# EAGLE board rev7 (EAGLE 9.4.2)
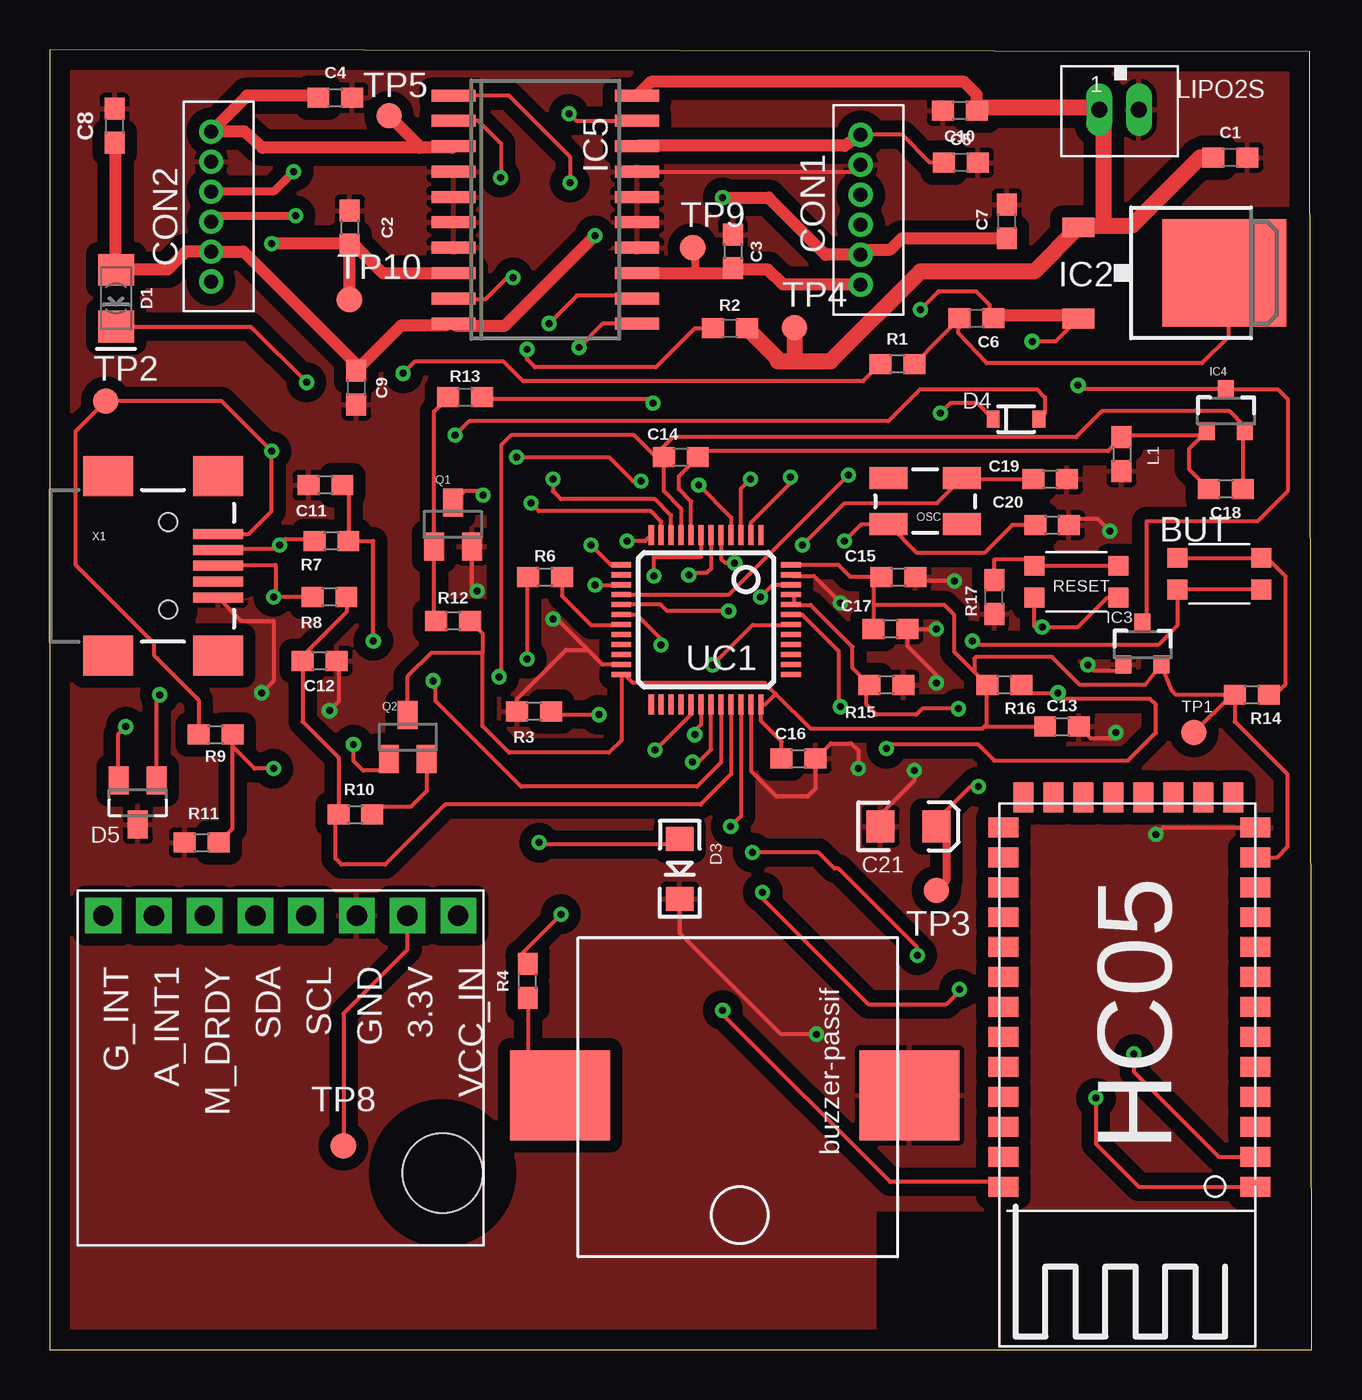
[diagram p0: board, top side]
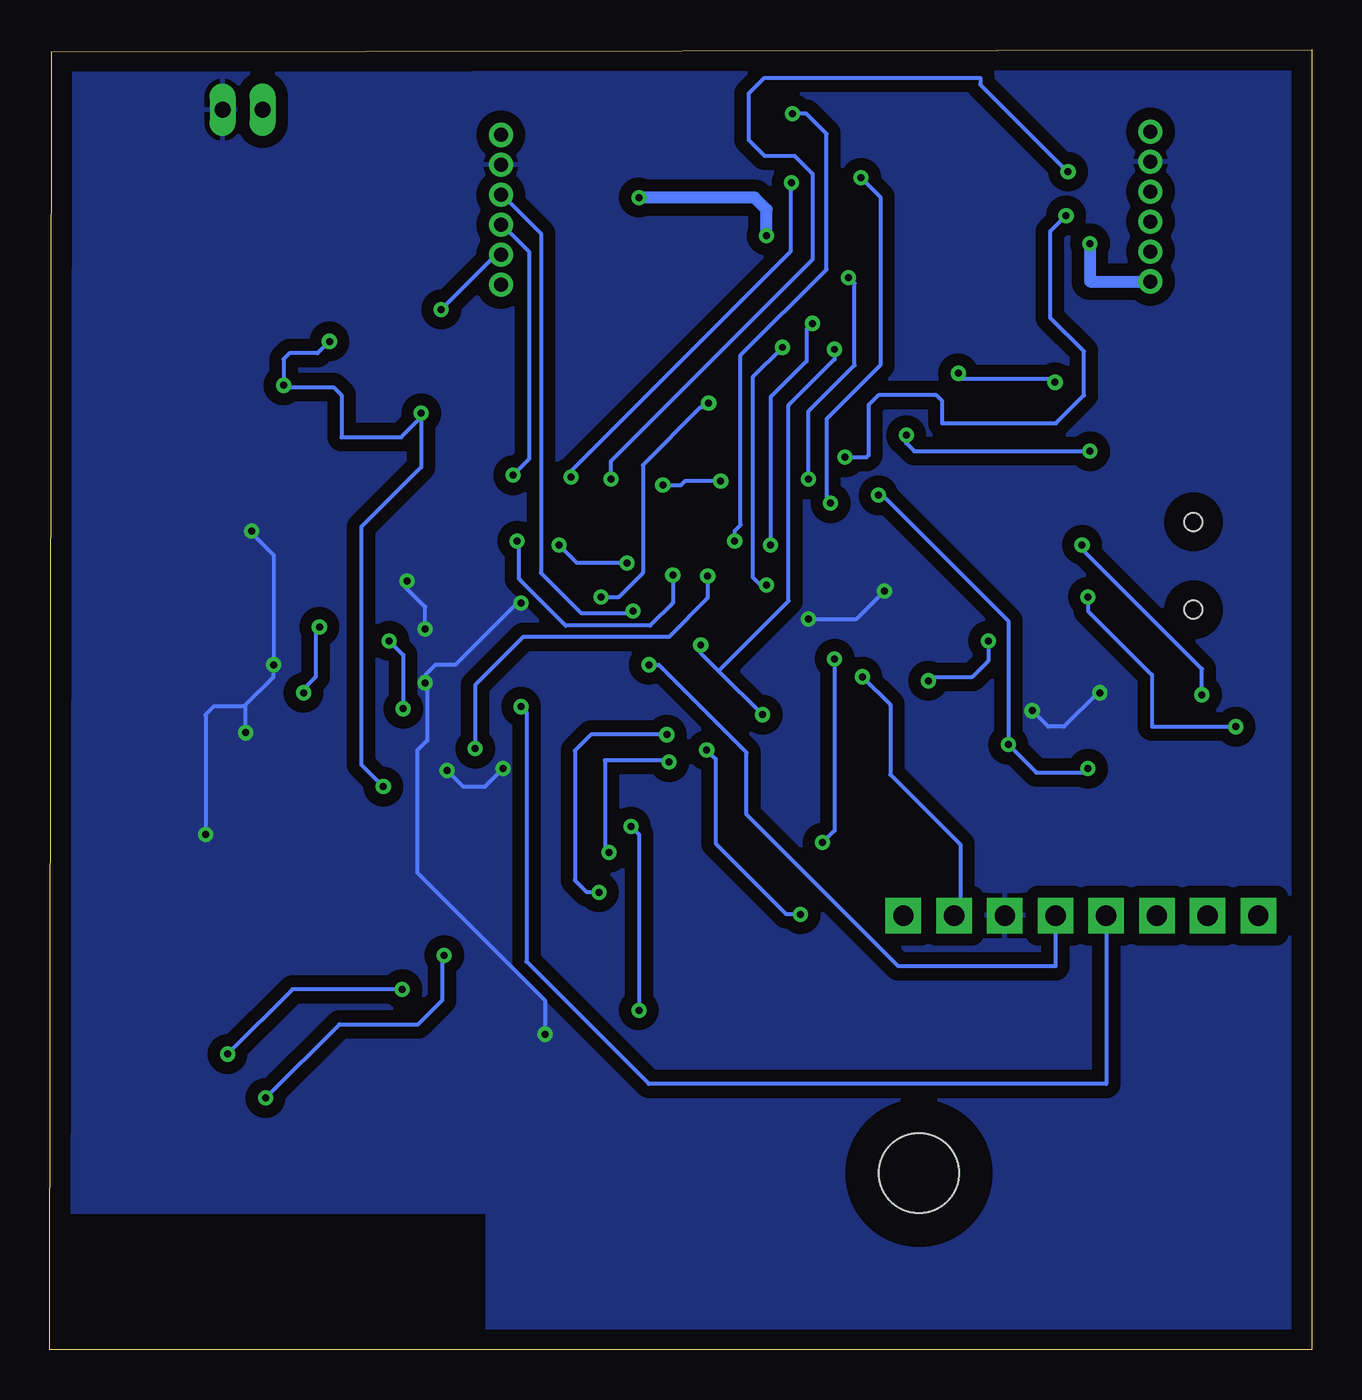
[diagram p1: board, bottom side, seen from below]

Size 63.2 x 65.1 mm. Coordinates in mm from the lower left corner, seen from the top.
Outline: 0,0 63.2,0 63.1,65 0,65.1 0,0
Copper layers (1*16): Top 0.035mm / dielectric 1.5mm / Bottom 0.035mm
Design rules "default": minimum track width 6mil, minimum drill 0.35mm, track to track 6mil, track to pad 6mil, pad to pad 6mil, via to via 6mil, smd to smd 6mil, copper to edge 40mil, drill to drill 6mil, minimum pad ring 10mil, minimum via ring 8mil, stop-mask expansion 4mil, vias tented up to drill 0mil, thermal gap 10mil
Net classes: 0 default: width 0.203 mm; 2 bigalime: width 0.381 mm

## Footprints (pad centres in the part's own frame; a part is rotated, then mirrored left to right if it is on the bottom)
PUSHBUTTON-KMR241GLFS = smd 1 x 1: P$1 2.1,0.8; P$2 2.1,-0.8; P$3 -2.1,0.8; P$4 -2.1,-0.8
0603 = smd 1.1 x 1: 1 -0.85,0; 2 0.85,0
EIA3216 = smd 1.4 x 1.6: A 1.4,0; C -1.4,0
B6B-ZR = drill 0.7: 1 9,-1.3; 2 7.5,-1.3; 3 6,-1.3; 4 4.5,-1.3; 5 3,-1.3; 6 1.5,-1.3
FKIT-LED-1206 = smd 1.6 x 1.803: A -1.422,0; C 1.422,0
LED-1206 = smd 1.2 x 1.4: A -1.5,0; C 1.5,0
SOD-323 = smd 0.63 x 0.83: 1 -1.15,0; 2 1.15,0
SOT23 = smd 1 x 1.4: 1 -0.95,-1.1; 2 0.95,-1.1; 3 0,1.1
DPACK_3 = smd 1 x 1.6: 1 -2.28,-4.8; 3 2.28,-4.8 | smd 5.4 x 6.2: 4 0,2.5
SOT23' = smd 0.8 x 0.9: 1 -0.95,-1; 2 0.95,-1; 3 0,1.1
SO20 = smd 0.6 x 2.2: 1 -5.715,-4.6; 2 -4.445,-4.6; 3 -3.175,-4.6; 4 -1.905,-4.6; 5 -0.635,-4.6; 6 0.635,-4.6; 7 1.905,-4.6; 8 3.175,-4.6; 9 4.445,-4.6; 10 5.715,-4.6; 11 5.715,4.6; 12 4.445,4.6; 13 3.175,4.6; 14 1.905,4.6; 15 0.635,4.6; 16 -0.635,4.6; 17 -1.905,4.6; 18 -3.175,4.6; 19 -4.445,4.6; 20 -5.715,4.6
JST_B2B-PH_HEADER = drill 0.8 long: P1 1.075,0.048; P2 -0.925,0.048
CRYSTAL-SMD-5X3 = smd 1.9 x 1.1: 1 -1.85,-1.15; 2 1.85,-1.15; 3 1.85,1.15; 4 -1.85,1.15
B1,27 = smd 1.27 x 1.27: TP 0,0
BUZZER-PASSIF = smd 4.5 x 5: P$1 0,2.5; P$2 0,20
HC-05 = smd 1.5 x 1: 3.3 0,-16.5; GND 0,-18; KEY 12.6,0; P$3 0,-3; P$4 0,-4.5; P$5 0,-6; P$6 0,-7.5; P$7 0,-9; P$8 0,-10.5; P$9 0,-12; P$10 0,-13.5; P$11 0,-15; P$23 12.6,-1.5; P$24 12.6,-3; P$25 12.6,-4.5; P$26 12.6,-6; P$27 12.6,-7.5; P$28 12.6,-9; P$29 12.6,-10.5; P$30 12.6,-12; P$31 12.6,-13.5; P$32 12.6,-15; P$33 12.6,-16.5; P$34 12.6,-18; RX 0,-1.5; TX 0,0 | smd 1 x 1.5: P$14 1.1,-19.5; P$15 2.6,-19.5; P$16 4.1,-19.5; P$17 5.6,-19.5; P$18 7.1,-19.5; P$19 8.6,-19.5; P$20 10.1,-19.5; P$21 11.6,-19.5
GY-85 = drill 1.016 pad 1.778 square: 3.3 0,15.24; A_INT1 0,2.54; G_INT 0,0; GND 0,12.7; M_DRDY 0,5.08; SCL 0,10.16; SDA 0,7.62; VCC_IN 0,17.78 | hole 4: 12.9,17
LQFP48 = smd 0.254 x 1: 1 -2.75,-4.25; 2 -2.25,-4.25; 3 -1.75,-4.25; 4 -1.25,-4.25; 5 -0.75,-4.25; 6 -0.25,-4.25; 7 0.25,-4.25; 8 0.75,-4.25; 9 1.25,-4.25; 10 1.75,-4.25; 11 2.25,-4.25; 12 2.75,-4.25; 25 2.75,4.25; 26 2.25,4.25; 27 1.75,4.25; 28 1.25,4.25; 29 0.75,4.25; 30 0.25,4.25; 31 -0.25,4.25; 32 -0.75,4.25; 33 -1.25,4.25; 34 -1.75,4.25; 35 -2.25,4.25; 36 -2.75,4.25 | smd 1 x 0.254: 13 4.25,-2.75; 14 4.25,-2.25; 15 4.25,-1.75; 16 4.25,-1.25; 17 4.25,-0.75; 18 4.25,-0.25; 19 4.25,0.25; 20 4.25,0.75; 21 4.25,1.25; 22 4.25,1.75; 23 4.25,2.25; 24 4.25,2.75; 37 -4.25,2.75; 38 -4.25,2.25; 39 -4.25,1.75; 40 -4.25,1.25; 41 -4.25,0.75; 42 -4.25,0.25; 43 -4.25,-0.25; 44 -4.25,-0.75; 45 -4.25,-1.25; 46 -4.25,-1.75; 47 -4.25,-2.25; 48 -4.25,-2.75
USB-MINIB = smd 2.5 x 0.5: D+ 2.5,0; D- 2.5,0.8; GND 2.5,-1.6; ID 2.5,-0.8; VBUS 2.5,1.6 | smd 2.5 x 2: GND@1 -3,-4.5; GND@2 -3,4.5; GND@3 2.5,4.5; GND@4 2.5,-4.5 | hole 0.9: 0,2.2; 0,-2.2

## Placement (x,y rotation side)
BUT  KMR211GLFS  [PUSHBUTTON-KMR241GLFS]  58.57,38.86 0 top
C1  0.1uF  [0603]  59.13,59.71 0 top
C2  22nF  [0603]  15.02,56.21 270 top
C3  22nF  [0603]  34.21,55.01 270 top
C4  22nF  [0603]  14.3,62.71 0 top
C5  22nF  [0603]  45.63,59.46 0 top
C6  0.1uF  [0603]  46.42,51.66 180 top
C7  22nF  [0603]  47.94,56.51 90 top
C8  22nF  [0603]  3.24,61.3 90 top
C9  22nF  [0603]  15.34,48.19 270 top
C10  22nF  [0603]  45.58,62.06 180 top
C11  47pF  [0603]  13.8,43.3 180 top
C12  47pF  [0603]  13.5,34.5 0 top
C13  10uF  [0603]  50.7,31.2 0 top
C14  1uF  [0603]  31.6,44.7 0 top
C15  1uF  [0603]  42.5,38.7 0 top
C16  1uF  [0603]  37.5,29.6 0 top
C17  1uF  [0603]  42.1,36.1 0 top
C18  10uF  [0603]  58.9,43.1 180 top
C19  18pF  [0603]  50.1,43.6 0 top
C20  18pF  [0603]  50.2,41.3 0 top
C21  100uF  [EIA3216]  43.01,26.21 0 top
CON1  B6B-ZR  [B6B-ZR]  39.31,51.84 90 top
CON2  B6B-ZR  [B6B-ZR]  6.77,52 90 top
D1  [FKIT-LED-1206]  3.31,52.66 270 top
D3  Blue  [LED-1206]  31.55,24.08 270 top
D4  [SOD-323]  48.39,46.61 0 top
D5  PESD1CAN  [SOT23]  4.4,27.4 180 top
IC2  MC78M05ABDT  [DPACK_3]  56.32,53.93 270 top
IC3  MCP1703T-3302E/CB  [SOT23']  54.73,35.31 0 top
IC4  MCP1703T-3302E/CB  [SOT23']  58.91,47.01 0 top
IC5  L293DD  [SO20]  24.82,57.1 270 top
L1  ferrite bead  [0603]  53.68,44.86 270 top
LIPO2S  JST-PH_2-PIN_HEADER  [JST_B2B-PH_HEADER]  53.63,62.15 180 top
OSC  8MHz  [CRYSTAL-SMD-5X3]  43.84,42.5 0 top
Q1  NPN-BJT  [SOT23]  20.19,41.33 0 top
Q2  NPN-BJT  [SOT23]  17.93,30.68 0 top
R1  133  [0603]  42.44,49.37 0 top
R2  60k  [0603]  34.06,51.16 0 top
R3  30k  [0603]  24.25,31.96 180 top
R4  100  [0603]  23.94,18.46 90 top
R6  1k  [0603]  24.8,38.7 0 top
R7  22  [0603]  14.1,40.5 180 top
R8  22  [0603]  14,37.7 180 top
R9  10k  [0603]  8.3,30.8 180 top
R10  1.5k  [0603]  15.3,26.8 0 top
R11  36k  [0603]  7.6,25.4 0 top
R12  47k  [0603]  20.2,36.5 0 top
R13  1k  [0603]  20.8,47.7 0 top
R14  1k  [0603]  60.2,32.8 180 top
R15  10k  [0603]  41.9,33.3 180 top
R16  10k  [0603]  47.8,33.3 180 top
R17  1k  [0603]  47.3,37.7 90 top
RESET  KMR211GLFS  [PUSHBUTTON-KMR241GLFS]  51.42,38.46 0 top
TP1  PTR1B1,27  [B1,27]  57.3,30.9 0 top
TP2  PTR1B1,27  [B1,27]  2.8,47.5 0 top
TP3  PTR1B1,27  [B1,27]  44.4,23 0 top
TP4  PTR1B1,27  [B1,27]  37.3,51.2 0 top
TP5  PTR1B1,27  [B1,27]  17,61.8 0 top
TP8  PTR1B1,27  [B1,27]  14.7,10.2 0 top
TP9  PTR1B1,27  [B1,27]  32.2,55.2 0 top
TP10  PTR1B1,27  [B1,27]  15,52.6 0 top
U$1  BUZZER-PASSIF  [BUZZER-PASSIF]  45.56,12.74 90 top
U$4  HC05  [HC-05]  60.37,8.16 180 top
U$6  GY-85  [GY-85]  2.67,21.74 270 top
UC1  STM32F103CBT6  [LQFP48]  32.87,36.56 180 top
X1  USB-MINIB  [USB-MINIB]  5.92,39.26 0 top

## Library data of the parts
BUT IC3 IC4 RESET = okie
C1 C6 C11-C20 = SparkFun-Capacitors; PROD_ID: CAP-00810
C2-C5 C7-C10 = SparkFun-Capacitors; PROD_ID: CAP-07885
C21 D4 L1 = SparkFun3
CON1 CON2 = jst
D1 = SparkFun-LED
D3 = SparkFun
D5 = diode
IC2 = linear
IC5 = st-microelectronics; OC_FARNELL: unknown
LIPO2S = srg
OSC Q1 Q2 X1 = SparkFun2
R1-R4 R6-R17 = SparkFun-Resistors; PROD_ID: RES-08787
TP1-TP5 TP8-TP10 = testpad
U$1 = buzzer_smd
U$4 = rhoban; FARNELL: MODULE HC-05
U$6 = rhoban
UC1 = stm32

## Nets
1A: IC5.2 UC1.11
2A: IC5.9 UC1.10
3/AIN: R2.1 R3.1 UC1.18
3A: IC5.12 UC1.13
4A: IC5.19 UC1.12
5V: C6.1 C7.1 C8.1 C9.1 C21.A CON1.5 CON2.5 D1.A D4.1 IC2.3 IC3.3 IC4.3 IC5.10 TP3.TP
9V: C1.1 C10.1 IC2.1 IC5.20 LIPO2S.P1 R2.2 TP4.TP
23_USBDP: C12.1 R8.1 R10.1 UC1.33
24_USBDM: C11.1 R7.1 UC1.32
27/PWM: R4.2 UC1.29
32: BUT.P$2 BUT.P$4 R15.2 UC1.44 UC1.45
33: R6.2 UC1.19
+5V/2: D4.2 R9.2 TP2.TP X1.VBUS
AV+: C14.1 C18.1 IC4.2 TP8.TP U$6.3.3 UC1.9
AV-: C14.2 C18.2 IC4.1 L1.1 UC1.8
DGND: C1.2 C2.1 C3.1 C4.2 C5.2 C7.2 C8.2 C9.2 C10.2 C11.2 C12.2 C13.2 C15.2 C16.2 C17.2 C19.2 C20.2 C21.C CON1.2 CON2.2 D3.C D5.3 IC3.1 IC5.4 IC5.5 IC5.6 IC5.7 IC5.14 IC5.15 IC5.16 IC5.17 L1.2 LIPO2S.P2 Q1.2 R3.2 R11.1 R15.1 R17.1 U$1.P$1 U$4.GND U$6.GND UC1.23 UC1.35 UC1.47 X1.GND
DISC: R13.2 UC1.46
EN: U$4.KEY UC1.34
GNDA: C6.2 IC2.4 R1.2
MM4: CON2.3 UC1.3
MM5: CON2.4 UC1.4
MM6: CON1.4 UC1.16
MM7: CON1.3 UC1.17
MM28: IC5.1 UC1.2
MM29: IC5.11 UC1.15
N$1: D1.C R1.1
N$2: R4.1 U$1.P$2
N$6: UC1.40
N$20: BUT.P$1 BUT.P$3 R14.1
N$21: R17.2 RESET.P$1 RESET.P$3
N$22: D3.A R6.1
N$51: Q2.2 R10.2
N$59: D5.1 R7.2 X1.D-
N$60: D5.2 R8.2 X1.D+
N$71: Q1.3 Q2.1 R9.1 R11.2
N$73: Q1.1 R12.1 R13.1
NONE: U$6.VCC_IN
OSC_IN: C19.1 OSC.3 UC1.5
OSC_OUT: C20.1 OSC.1 UC1.6
OUT1: C4.1 CON2.1 IC5.3 TP5.TP
OUT2: C2.2 CON2.6 IC5.8 TP10.TP
OUT3: C3.2 CON1.6 IC5.13 TP9.TP
OUT4: C5.1 CON1.1 IC5.18
RESET: R16.1 RESET.P$2 RESET.P$4 UC1.7
RX: U$4.RX UC1.30
SCL: U$6.SCL UC1.42
SDA: U$6.SDA UC1.43
TX: U$4.TX UC1.31
VBAT: UC1.1
VCC: C13.1 C15.1 C16.1 C17.1 IC3.2 Q2.3 R12.2 R14.2 R16.2 TP1.TP U$4.3.3 UC1.24 UC1.36 UC1.48

## Tracks (layer width: path | path; a pad name or v marks a point on that pad's centre or on a via)
1A  (via drill 0.35)
  Top 0.203: UC1.11 30.62,41.48 30.1,42 24.5,42 v24.1,42.4 | v22.57,58.7 22.6,58.73 22.6,60.4 21.46,61.54 IC5.2
  Bottom 0.203: v24.1,42.4 24.3,42.6 24.3,46.6 21.6,49.3 21.6,57.73 v22.57,58.7
2A  (via drill 0.35)
  Top 0.203: UC1.10 31.12,41.78 30.3,42.6 25.6,42.6 25.2,43 v25.2,43.6 | v23.2,53.7 22.9,53.7 21.8,52.6 20.27,52.6 IC5.9
  Bottom 0.203: v25.2,43.6 25.2,47 22.9,49.3 22.9,53.4 v23.2,53.7
3/AIN  (via drill 0.35)
  Top 0.203: v30.6,35.3 30.6,35.6 29.4,36.8 28.8,36.8 UC1.18 | v23.9,50.1 23.9,49.6 24.3,49.2 30.35,49.2 32.31,51.16 R2.1 | R3.1 25.25,31.8 v27.5,31.8
  Bottom 0.203: 29.7,34 v27.5,31.8 | 29.7,34 30.6,34.9 v30.6,35.3 | 29.7,34 26.2,37.5 26.2,47.3 23.9,49.6 v23.9,50.1
3A  (via drill 0.35)
  Top 0.203: UC1.13 28.1,39.3 v27.1,40.3 | v25,51.4 26.4,52.8 29.3,52.8 IC5.12
  Bottom 0.203: v25,51.4 25.3,51.1 25.3,49.5 27.1,47.7 v27.1,40.3
4A  (via drill 0.35)
  Top 0.203: v28.9,40.5 v28.91,40.51 29.82,40.51 UC1.12 | v26,61.9 26.36,61.54 IC5.19
  Bottom 0.203: v28.9,40.5 28.9,41 28.6,41.3 28.6,49.8 24.3,54.1 24.3,60.9 25.3,61.9 v26,61.9
5V  (via drill 0.35)
  Top 0.203: 47.4,51.8 C6.1 47.07,51.86 47.07,52.33 46.4,53 44.5,53 v43.6,52.1 | 51.3,51.8 IC2.3 50.38,50.5 v49.2,50.5 | 19.8,51.3 IC5.10 20.3,51.3 | 3.3,60.41 C8.1 | 3.3,54.3 D1.A | 15.28,49.42 C9.1 | D4.1 46.45,47.4 45.1,47.4 v44.6,46.9 | v51.5,48.3 51.7,48.1 IC4.3 61.49,48.11 62,47.6 62,43 60.5,41.5 54.93,41.5 54.93,36.61 IC3.3 | v46.5,28.2 46.1,28.2 44.41,26.51 C21.A
  Top 0.406: C21.A 44.9,25.71 44.9,23.5 TP3.TP
  Top 0.61: 51.3,51.8 47.4,51.8 | C7.1 42.66,55.66 42.1,55.1 40.61,55.1 CON1.5 38.86,54.84 36,57.7 v33.7,57.7 | C9.1 17.6,51.3 19.8,51.3 | 3.3,54.3 3.3,60.41 | D1.A 3.33,54.1 5.9,54.1 6.8,55 CON2.5 9.7,55 15.28,49.42 | v27.3,55.8 22.8,51.3 20.3,51.3
  Bottom 0.203: v43.6,52.1 40.9,54.8 40.7,54.8 | v46.5,28.2 47.6,29.3 47.6,41.2 44.6,44.2 v44.6,46.9 44.6,46.7 45.6,45.7 48.6,45.7 48.6,47.8 49,48.2 51.4,48.2 v51.5,48.3 51.5,49.6 51.2,49.9 49.8,49.9 v49.2,50.5
  Bottom 0.61: 40.7,54.8 CON1.5 | v27.3,55.8 27.3,57.1 27.9,57.7 v33.7,57.7
9V
  Top 0.203: 51.8,56.3 IC2.1 | 52.8,61.96 LIPO2S.P1 | 36.47,49.6 36.47,49.5
  Top 0.61: C10.1 46.43,62.86 45.78,63.5 30.1,63.5 IC5.20
  Top 0.813: C10.1 46.57,62.2 52.46,62.2 LIPO2S.P1 | IC2.1 49.3,54 43.6,54 39.1,49.5 37.3,49.5 | C1.1 57.61,59.71 54.2,56.3 52.8,56.3 | 51.8,56.3 52.8,56.3 | 52.8,56.3 52.8,61.96 | 36.47,49.5 37.3,49.5 | TP4.TP 37.3,49.5 | R2.2 36.47,49.6
23_USBDP
  Top 0.203: UC1.33 34.12,28.82 32.6,27.3 19.8,27.3 16.8,24.3 14.6,24.3 14.3,24.6 14.3,26.8 R10.1 14.45,29.65 12.65,31.45 C12.1 12.65,34.75 14.85,36.95 R8.1
24_USBDM  (via drill 0.35)
  Top 0.203: UC1.32 33.62,29.42 32.4,28.2 23.6,28.2 19.3,32.5 19.3,33.4 v19.2,33.5 | C11.1 14.95,43 R7.1 16.2,40.5 v16.2,35.5
  Bottom 0.203: v19.2,33.5 19,33.7 17,33.7 16.2,34.5 v16.2,35.5
27/PWM  (via drill 0.35)
  Top 0.203: UC1.29 32.12,31.81 30.34,30.03 v30.3,30.03 | v25.6,21.8 23.52,19.72 R4.2
  Bottom 0.203: v30.3,30.03 29.86,29.59 29.86,25.36 26.3,21.8 v25.6,21.8
32  (via drill 0.35)
  Top 0.203: 37.3,37.3 38.1,37.3 40.2,35.2 40.2,34.15 R15.2 40.9,33.15 40.9,32.3 41.4,31.8 43.4,31.8 43.7,32.1 v45.5,32.1 | 37.3,37.3 37.3,37.8 UC1.45 | 37.3,37.3 UC1.44 | v46.2,35.5 46.2,35.3 55.51,35.3 56.47,36.26 BUT.P$4 BUT.P$2
  Bottom 0.203: v46.2,35.5 45.5,34.8 v45.5,32.1
33
  Top 0.203: UC1.19 28.3,36.3 27.1,36.3 25.65,37.75 R6.2
+5V/2  (via drill 0.35)
  Top 0.203: D4.2 49.84,46.91 49.84,47.69 49.43,48.1 43.6,48.1 42,46.5 21,46.5 v20.3,45.8 | R9.2 7.45,32.55 5.2,34.8 5.2,35.4 1.3,39.3 1.3,46 TP2.TP 8.6,47.5 v11.1,45 11.1,42 9.96,40.86 X1.VBUS
  Bottom 0.203: v20.3,45.8 20.3,45.4 19.9,45 v11.1,45
AV+  (via drill 0.35)
  Top 0.203: UC1.9 31.62,42.12 30.75,42.99 C14.1 30.48,44.98 | v22.5,33.7 22.6,33.8 22.6,45.3 23.1,45.8 29.25,45.8 30.27,44.77 30.48,44.98 | TP8.TP 14.7,16.83 17.91,20.04 U$6.3.3 | C18.1 59.75,45.9 IC4.2 59.86,46.24 59.1,47 52.7,47 51.4,45.7 31.2,45.7 30.48,44.98
  Bottom 0.203: U$6.3.3 17.6,22.05 17.6,25.3 21.1,28.8 21.1,32.3 v22.5,33.7
AV-
  Top 0.203: C18.2 57.06,44.09 57.06,45.11 IC4.1 57.8,45.8 53.8,45.8 L1.1 53.3,45.3 53,45 32.75,45 C14.2 31.5,43.75 31.5,43.1 32.12,42.48 UC1.8
DGND  (via drill 0.35)
  Top 0.203: UC1.23 27.69,34.31 26.95,35.05 | 26.95,35.05 25.4,36.6 v25.2,36.6 | v21.4,38 21.14,38.26 Q1.2 | v52,34.3 52.3,34 53.47,34 IC3.1 | v40.5,29.1 40.5,30 40.13,30.37 39.12,30.37 C16.2 38.35,28.1 37.95,27.7 36.4,27.7 35.12,28.98 UC1.35 | v43.3,29 43.3,28.5 41.61,26.81 C21.C | C13.2 52.15,30.6 53.15,30.6 53.4,30.86 v53.4,30.9 | v53.1,41 52.5,41.6 51.35,41.6 C20.2 | X1.GND 9.58,36.5 11.2,36.5 11.2,33.5 v10.6,32.9 | v14,32 14.45,32.45 14.45,34.4 C12.2 | v38.4,15.8 36.62,15.8 31.55,20.88 D3.C | v44.4,33.4 44.4,33.8 42.95,35.25 C17.2 44,36.1 44.1,36 44.3,36 v44.4,36.1 | UC1.47 37.17,38.76 38.26,38.76 v39.61,37.41 v39.6,37.4 | v45.3,38.5 43.55,38.5 C15.2 | R3.2 23.4,32.6 25.85,35.05 26.95,35.05 | IC5.17 40.27,59 CON1.2 | v55.4,25.8 55.76,26.16 U$4.GND
  Bottom 0.203: v25.2,36.6 22.8,36.6 v21.4,38 | v40.5,29.1 41.4,28.2 42.5,28.2 v43.3,29 | v53.4,30.9 53.4,32.2 | 53.4,32.2 53.4,32.3 52,33.7 v52,34.3 52,39.8 53.1,40.9 v53.1,41 | v10.6,32.9 10.7,32.9 12.4,31.2 13.2,31.2 v14,32 | v38.4,15.8 38.4,17.5 44.8,23.9 44.8,30 44.3,30.5 44.3,33.3 v44.4,33.4 44.4,33.8 43.9,34.3 42.9,34.3 39.8,37.4 v39.6,37.4 | v44.4,36.1 44.4,37.2 45.4,38.2 45.4,38.4 v45.3,38.5 | 53.4,32.2 55,32.2 55.4,31.8 v55.4,25.8
  pour Top (isolate 0.61): 0.4,64.6 62.6,64.6 62.6,7 41.3,7 41.3,0.6 0.4,0.6
  pour Bottom (isolate 0.61): 0.7,64.5 62.6,64.5 62.6,6.9 41.3,6.9 41.3,0.9 0.7,0.9
DISC  (via drill 0.35)
  Top 0.203: UC1.46 36.2,38.3 v35.6,37.7 | R13.2 21.75,47.6 30,47.6 v30.2,47.4
  Bottom 0.203: v30.2,47.4 30.4,47.2 30.6,47.2 33.5,44.3 33.5,38.9 34.7,37.7 v35.6,37.7
EN  (via drill 0.35)
  Top 0.203: v33.7,17 33.7,16.8 42.1,8.4 47.4,8.4 U$4.KEY | UC1.34 34.62,26.72 v34.1,26.2
  Bottom 0.203: v34.1,26.2 33.7,25.8 v33.7,17
GNDA
  Top 0.203: R1.2 44.6,50.68 C6.2 45.51,50.92 46.92,49.4 57.7,49.4 59.02,50.72 59.02,53.73 IC2.4
MM4  (via drill 0.35)
  Top 0.203: UC1.3 34.6,40.83 34.6,43.1 v35.1,43.6
  Top 0.406: v12.2,59 11.2,58 CON2.3
  Bottom 0.203: v35.1,43.6 35.1,44.5 25,54.6 25,58.9 25.9,59.8 27.4,59.8 28.2,60.6 28.2,62.9 27.4,63.7 16.6,63.7 16.6,63.37 12.23,59 v12.2,59
MM5  (via drill 0.35)
  Top 0.203: v23.37,44.7 28,44.7 29.2,43.5 v29.6,43.5 | v32.5,43.3 34.12,41.68 UC1.4
  Top 0.406: CON2.4 8.37,56.8 v12.3,56.8
  Bottom 0.203: v12.3,56.8 13.1,56 13.1,51.7 11.4,50 11.4,47.8 12.8,46.4 18.5,46.4 18.5,47.5 18.8,47.8 21.7,47.8 22.2,47.3 22.2,44.8 22.3,44.7 v23.37,44.7 | v29.6,43.5 31.4,43.5 31.6,43.3 v32.5,43.3
MM6  (via drill 0.35)
  Top 0.203: v40,43.8 34,37.8 28.8,37.8 UC1.16
  Bottom 0.203: v40,43.8 39.2,44.6 39.2,55 40.44,56.24 40.51,56.24 CON1.4
MM7  (via drill 0.35)
  Top 0.203: UC1.17 30.59,37.31 30.9,37 v34,37
  Bottom 0.203: v34,37 34.1,36.9 36.6,36.9 38.6,38.9 38.6,55.9 40.54,57.84 CON1.3
MM28  (via drill 0.35)
  Top 0.203: v37.1,43.7 37.1,43.4 35.1,41.4 35.1,40.83 UC1.2 | v26.05,58.45 26.05,59.75 22.99,62.81 IC5.1
  Bottom 0.203: v37.1,43.7 37.1,44 26.1,55 26.1,58.4 v26.05,58.45
MM29  (via drill 0.35)
  Top 0.203: v27.3,38.3 28.3,38.3 UC1.15 | IC5.11 27.68,51.38 v26.5,50.2
  Bottom 0.203: v27.3,38.3 27.6,38.3 28,38.7 28,48.7 v26.5,50.2
N$1  (via drill 0.35)
  Top 0.203: R1.1 40.73,48.5 23.7,48.5 22.7,49.5 18.3,49.5 v17.7,48.9 | D1.C 10.06,51.24 v12.85,48.45
  Bottom 0.203: v12.85,48.45 13,48.6 17.7,48.6 v17.7,48.9
N$2
  Top 0.203: U$1.P$2 23.94,14.36 R4.1
N$20
  Top 0.203: BUT.P$3 BUT.P$1 60.97,39.66 61.9,38.73 61.9,33.35 61.35,32.8 R14.1
N$21
  Top 0.203: RESET.P$1 RESET.P$3 49.02,39.56 47.3,39.56 R17.2
N$22  (via drill 0.35)
  Top 0.203: D3.A 31.27,25.3 24.6,25.3 v24.5,25.4 | R6.1 23.9,38.65 v23.9,34.6
  Bottom 0.203: v23.9,34.6 23.9,26 v24.5,25.4
N$51
  Top 0.203: Q2.2 18.88,27.98 18.1,27.2 16.55,27.2 R10.2
N$59  (via drill 0.35)
  Top 0.203: X1.D- 8.48,40.1 11.3,40.1 v11.5,40.3 11.8,40.6 13.15,40.6 R7.2 | D5.1 5.35,32.65 v5.5,32.8
  Bottom 0.203: v11.5,40.3 11.5,40.1 5.5,34.1 v5.5,32.8
N$60  (via drill 0.35)
  Top 0.203: X1.D+ 8.8,39.3 11.3,39.3 11.3,37.7 | 11.3,37.7 v11.2,37.7 | R8.2 11.3,37.7 | v3.8,31.2 3.4,30.8 3.4,28.55 D5.2
  Bottom 0.203: v11.2,37.7 11.2,37 8,33.8 8,31.2 v3.8,31.2
N$71  (via drill 0.35)
  Top 0.203: v15.2,30.3 15.2,29.5 15.7,29 16.84,29 Q2.1 | v11.2,29.1 10.26,29.1 9.15,30.2 R9.1 9.15,26.1 R11.2 | v21.7,42.8 21.5,43 20.76,43 Q1.3
  Bottom 0.203: v11.2,29.1 11.4,28.9 13.8,28.9 v15.2,30.3 15.2,36.5 21.5,42.8 v21.7,42.8
N$73
  Top 0.203: R13.1 19.24,46.99 Q1.1 19.24,36.61 R12.1
OSC_IN  (via drill 0.35)
  Top 0.203: v34.3,39.4 33.83,39.4 33.62,39.61 UC1.5 | v37.7,40.3 39.8,42.4 44.44,42.4 OSC.3 45.74,43.6 C19.1
  Bottom 0.203: v34.3,39.4 36.8,39.4 v37.7,40.3
OSC_OUT  (via drill 0.35)
  Top 0.203: UC1.6 33.12,39.12 32.9,38.9 32.1,38.9 v32,38.8 | v39.8,40.5 40.65,41.35 OSC.1 43.44,39.9 46.8,39.9 48.2,41.3 C20.1
  Bottom 0.203: v32,38.8 32,37.4 33.13,36.27 37.37,36.27 39.7,38.6 39.7,40.4 v39.8,40.5
OUT1
  Top 0.203: 18.5,60.3 18.5,60.2
  Top 0.61: C4.1 13.35,62.81 9.87,62.81 9.87,62.8 CON2.1 9.75,61 10.65,60.2 18.5,60.2 20.14,60.2 IC5.3 | TP5.TP 18.5,60.3
OUT2  (via drill 0.35)
  Top 0.203: 15.3,55.3 C2.2 15,55.38 14.97,55.4 | 20.14,53.9 IC5.8
  Top 0.61: 15.3,55.3 16.7,53.9 20.14,53.9 | 14.97,55.4 v11.1,55.4 | TP10.TP 15,55.38
  Bottom 0.61: CON2.6 11.1,53.5 v11.1,55.4
OUT3
  Top 0.203: 34.33,54.1 C3.2 | 29.49,53.9 IC5.13 | TP9.TP 32.3,55.1
  Top 0.406: 32.3,55.1 32.3,53.9
  Top 0.61: CON1.6 36.71,53.34 35.95,54.1 34.33,54.1 | 29.49,53.9 32.3,53.9 33.83,53.9 C3.2
OUT4
  Top 0.203: CON1.1 42.69,60.84 44.08,59.46 C5.1
  Top 0.61: IC5.18 29.44,60.3 39.81,60.3 CON1.1
RESET  (via drill 0.35)
  Top 0.203: v30.25,38.75 30.25,39.71 32.62,39.71 UC1.7 | RESET.P$2 52.96,37.66 51.5,36.2 v49.7,36.2 49.32,36.2 RESET.P$4 | R16.1 49.05,32.9 v50.5,32.9 50.5,32.6 55.1,32.6 55.4,32.3 55.4,30.9 54,29.5 47.3,29.5 46.5,30.3 42.1,30.3 v41.9,30.1
  Bottom 0.203: v30.25,38.75 30.25,37.65 32.2,35.7 39.5,35.7 41.9,33.3 v41.9,30.1 | v49.7,36.2 49.9,36 49.9,33.7 50.5,33.1 v50.5,32.9
RX  (via drill 0.35)
  Top 0.203: UC1.30 32.62,31.32 32.3,31 v32.3,30.8 | v35.7,22.9 35.7,22.6 41,17.3 44.9,17.3 45.6,18 v45.55,18.05 | v54.3,14.8 54.3,13.9 58.54,9.66 U$4.RX
  Bottom 0.203: v32.3,30.8 36.1,30.8 36.9,30 36.9,23.5 36.3,22.9 v35.7,22.9 | v45.55,18.05 51.05,18.05 v54.3,14.8
SCL  (via drill 0.35)
  Top 0.203: v33.2,34.3 35.2,36.3 36.8,36.3 UC1.42
  Bottom 0.203: v33.2,34.3 32.7,34.3 28.3,29.9 28.3,26.8 20.7,19.2 12.83,19.2 U$6.SCL
SDA  (via drill 0.35)
  Top 0.203: v39.6,32.2 39.5,32.3 39.5,35 37.7,36.8 37.3,36.8 UC1.43
  Bottom 0.203: v39.6,32.2 39.33,31.93 39.33,19.43 33.2,13.3 10.29,13.3 U$6.SDA
TX  (via drill 0.35)
  Top 0.203: v32.19,29.43 32.49,29.43 33.12,30.06 UC1.31 | UC1.31 | v43.45,19.75 43.45,20.15 39.5,24.1 39.3,24.1 38.5,24.9 v35.2,24.9 | U$4.TX 54.54,8.16 52.4,10.3 v52.4,12.6
  Bottom 0.203: v43.45,19.75 43.55,19.65 43.55,17.5 44.75,16.3 48.7,16.3 v52.4,12.6 | v32.19,29.43 32.29,29.53 35.4,29.53 35.4,25.1 v35.2,24.9
VCC
  Top 0.203: Q2.3 17.93,33.73 19.1,34.9 21.67,34.9 | U$4.3.3 61.47,24.66 62,25.19 62,28.8 59.35,31.45 R14.2 59.2,32.8 | 46.8,31.2 46.9,31.3 46.9,33.25 R16.2 | 46.8,31.2 46.7,31.1 38.1,31.1 36.35,32.85 | 36.35,32.85 35.8,33.4 29.2,33.4 28.8,33.8 UC1.24 28.62,30.52 28,29.9 23,29.9 21.67,31.23 21.67,34.9 | 36.35,32.85 35.81,32.31 UC1.36 35.62,31.48 36.65,30.45 C16.1 | 46.8,31.2 C13.1 | UC1.48 39.5,39.3 40.1,38.7 C15.1 41.25,38.3 41.25,37.3 | 41.25,37.3 C17.1 | 59.2,32.8 56.4,32.8 56.2,33 IC3.2 54.86,33.3 51.6,33.3 50.2,34.7 46.4,34.7 46.3,34.6 46.3,33.95 R16.2 | R12.2 21.67,35.88 21.67,34.9 | R16.2 45.3,34.95 45.3,36.8 44.8,37.3 41.25,37.3 | TP1.TP 59.2,32.8